# Altium PCB pcb.PcbDoc
Units mm, origin at the board's own origin, x right, y up, seen from the top; angles counter-clockwise.
Board outline 9.5 x 170 mm, 2 copper layers (Top Layer, Bottom Layer), stack 2.101 mm thick; 2 components, 25 nets, 88 pads, 96 vias.
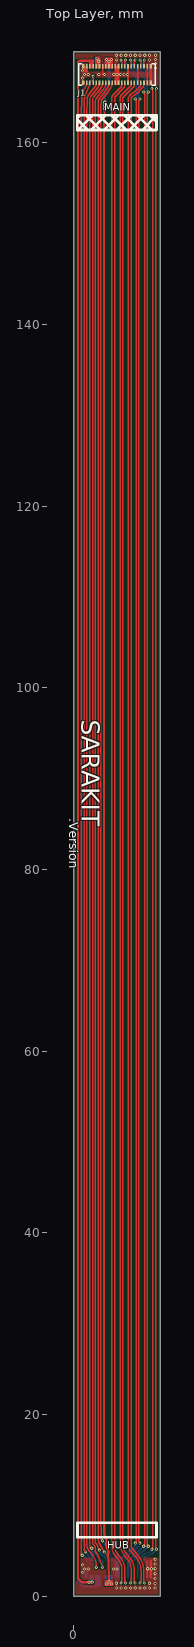
[diagram p0: Top Layer view]
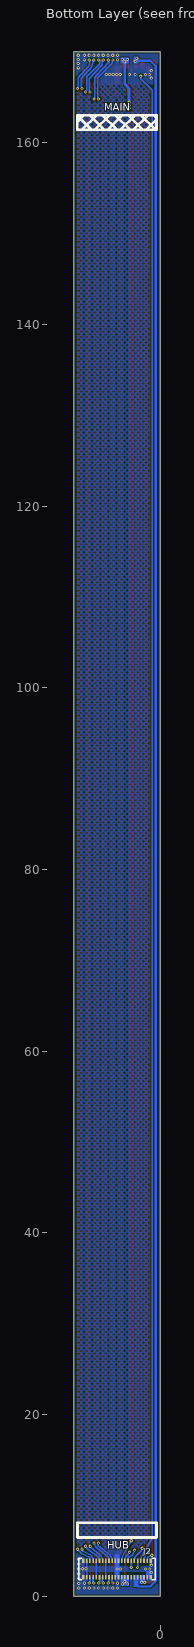
[diagram p1: Bottom Layer view, seen from below]

## Layer stack, top to bottom
Stiffener TOP: core 1, FR4, Dk 4.3
Top Solder: solder mask 0.05, Solder Resist, Dk 3.5
Top Layer: signal copper 0.018
Adhesive 1: prepreg 0.02, Dk 3.4
PI: prepreg 0.025, Polyamid, Dk 3.4
Adhesive 2: prepreg 0.02, Dk 3.4
Bottom Layer: signal copper 0.018
Bottom Solder: solder mask 0.05, Solder Resist, Dk 3.5
Stiffener BOTTOM: core 1, FR4, Dk 4.3

## Board outline
0,0 0,170 9.5,170 9.5,0
board region "STF TOP": 9.5,5 9.5,0 0,0 0,5
board region Flex: 9.5,165 9.5,5 0,5 0,165
board region "STF BOT": 0,165 0,170 9.5,170 9.5,165

## Design rules (kind name [scope] priority, off if disabled: settings)
BoardOutlineClearance [All] p1: gap=0.2 ignorepadtopadclearanceinfootprint=FALSE except(0: Arc-SplitBarrior Arc-SplitContinuation Track-SplitBarrior Track-SplitContinuation SMDPad-SplitBarrior SMDPad-SplitContinuation THPad-SplitBarrior THPad-SplitContinuation Via-SplitBarrior Via-SplitContinuation Fill-SplitBarrior Fill-SplitContinuation Poly-SplitBarrior Poly-SplitContinuation Region-SplitBarrior Region-SplitContinuation Text-SplitBarrior Text-SplitContinuation)
Clearance [All] p1: gap=0.15 ignorepadtopadclearanceinfootprint=FALSE
DiffPairsRouting [All] p1: maxlimit=0.15 minlimit=0.15 mostfreqgap=0.15 toplayer_minwidth=0.15 toplayer_maxwidth=0.15 toplayer_prefwidth=0.15 bottomlayer_minwidth=0.15 bottomlayer_maxwidth=0.15 bottomlayer_prefwidth=0.15 substack1={D1923DC9-8E3A-48FE-8771-0B67DC6D707B} toplayer_{d1923dc9-8e3a-48fe-8771-0b67dc6d707b}_mingap=0.254 toplayer_{d1923dc9-8e3a-48fe-8771-0b67dc6d707b}_maxgap=0.254 toplayer_{d1923dc9-8e3a-48fe-8771-0b67dc6d707b}_prefgap=0.254 toplayer_{d1923dc9-8e3a-48fe-8771-0b67dc6d707b}_minwidth=0.381 toplayer_{d1923dc9-8e3a-48fe-8771-0b67dc6d707b}_maxwidth=0.381 toplayer_{d1923dc9-8e3a-48fe-8771-0b67dc6d707b}_prefwidth=0.381 bottomlayer_{d1923dc9-8e3a-48fe-8771-0b67dc6d707b}_mingap=0.254 bottomlayer_{d1923dc9-8e3a-48fe-8771-0b67dc6d707b}_maxgap=0.254 bottomlayer_{d1923dc9-8e3a-48fe-8771-0b67dc6d707b}_prefgap=0.254 bottomlayer_{d1923dc9-8e3a-48fe-8771-0b67dc6d707b}_minwidth=0.381 bottomlayer_{d1923dc9-8e3a-48fe-8771-0b67dc6d707b}_maxwidth=0.381 bottomlayer_{d1923dc9-8e3a-48fe-8771-0b67dc6d707b}_prefwidth=0.381 substack2={E3085CE0-B6E7-47D6-8C69-CD32297CBFBA} toplayer_{e3085ce0-b6e7-47d6-8c69-cd32297cbfba}_mingap=0.254 toplayer_{e3085ce0-b6e7-47d6-8c69-cd32297cbfba}_maxgap=0.254 toplayer_{e3085ce0-b6e7-47d6-8c69-cd32297cbfba}_prefgap=0.254 toplayer_{e3085ce0-b6e7-47d6-8c69-cd32297cbfba}_minwidth=0.381 toplayer_{e3085ce0-b6e7-47d6-8c69-cd32297cbfba}_maxwidth=0.381 toplayer_{e3085ce0-b6e7-47d6-8c69-cd32297cbfba}_prefwidth=0.381 bottomlayer_{e3085ce0-b6e7-47d6-8c69-cd32297cbfba}_mingap=0.254 bottomlayer_{e3085ce0-b6e7-47d6-8c69-cd32297cbfba}_maxgap=0.254 bottomlayer_{e3085ce0-b6e7-47d6-8c69-cd32297cbfba}_prefgap=0.254 bottomlayer_{e3085ce0-b6e7-47d6-8c69-cd32297cbfba}_minwidth=0.381 bottomlayer_{e3085ce0-b6e7-47d6-8c69-cd32297cbfba}_maxwidth=0.381 bottomlayer_{e3085ce0-b6e7-47d6-8c69-cd32297cbfba}_prefwidth=0.381 maxuncoupledlength=12.7
HoleSize [All] p1: absolutevalues=TRUE maxlimit=10 minlimit=0.15 maxpercent=80.000 minpercent=20.000
HoleToHoleClearance [All] p1: gap=0.2 allowstackedmicrovias=TRUE
MinimumSolderMaskSliver [All] p1: minsoldermaskwidth=0.15
PolygonConnect [All] p1: connectstyle=Direct reliefconductorwidth=0.254 reliefentries=4 polygonreliefangle="90 Angle" airgapwidth=0.254
RoutingCorners [All] p1 off: cornerstyle=45-Degree minsetback=2.54 maxsetback=2.54
RoutingVias [All] p1: holewidth=0.15 width=0.35 viastyle="Through Hole" minholewidth=0.15 minwidth=0.35 maxholewidth=0.15 maxwidth=0.35
SilkToSilkClearance [All] p1: silktosilkclearance=0.1
SilkToSolderMaskClearance [IsPad] p1: minsilkscreentomaskgap=0.1 clearancetoexposedcopper=TRUE
SolderMaskExpansion SolderMaskExpansion_Vias [IsVia] p1: expansion=0.102 istentingtop=TRUE
SolderMaskExpansion [All] p2: expansion=0 istentingtop=FALSE
Width [All] p1: maxlimit=1 minlimit=0.15 preferedwidth=0.2 substack1={D1923DC9-8E3A-48FE-8771-0B67DC6D707B} substack2={E3085CE0-B6E7-47D6-8C69-CD32297CBFBA}
23 further rules are at their usual default settings.

## Classes and differential pairs
differential pair class 100OHM_DIFF: CAM0_CLK CAM0_D0 CAM0_D1 CAM1_CLK CAM1_D0 CAM1_D1
differential pair CAM1_D1: +CAM1_D1_P -CAM1_D1_N
differential pair CAM1_D0: +CAM1_D0_P -CAM1_D0_N
differential pair CAM1_CLK: +CAM1_CLK_P -CAM1_CLK_N
differential pair CAM0_D1: +CAM0_D1_P -CAM0_D1_N
differential pair CAM0_D0: +CAM0_D0_P -CAM0_D0_N
differential pair CAM0_CLK: +CAM0_CLK_P -CAM0_CLK_N

## Components (designator, comment, footprint, x,y, rotation, side; value= is the part's Value field where it differs from the comment)
J1 "5046224012" "MOLEX 5046224012" 4.75,167.5 r0 top
J2 "5046224012" "MOLEX 5046224012" 4.75,3 r0 bottom

## Footprints (in the part's own frame and the unit in brackets; to place one, negate y for a bottom-side part, rotate by r counter-clockwise, add the part's x,y. Pads: shape width x height; smd on the part's side, far side on the other; paste and mask are expansions set on the pad)
"MOLEX 5046224012" [mm]
  rrect20% 0.18x0.485 smd paste-0.01: 1(-3.325,-0.907) 2(-3.325,0.907) 3(-2.975,-0.907) 4(-2.975,0.907) 5(-2.625,-0.907) 6(-2.625,0.907) 7(-2.275,-0.907) 8(-2.275,0.907) 9(-1.925,-0.907) 10(-1.925,0.907) 11(-1.575,-0.907) 12(-1.575,0.907) 13(-1.225,-0.907) 14(-1.225,0.907) 15(-0.875,-0.907) 16(-0.875,0.907) 17(-0.525,-0.907) 18(-0.525,0.907) 19(-0.175,-0.907) 20(-0.175,0.907) 21(0.175,-0.907) 22(0.175,0.907) 23(0.525,-0.907) 24(0.525,0.907) 25(0.875,-0.907) 26(0.875,0.907) 27(1.225,-0.907) 28(1.225,0.907) 29(1.575,-0.907) 30(1.575,0.907) 31(1.925,-0.907) 32(1.925,0.907) 33(2.275,-0.907) 34(2.275,0.907) 35(2.625,-0.907) 36(2.625,0.907) 37(2.975,-0.907) 38(2.975,0.907) 39(3.325,-0.907) 40(3.325,0.907)
  rrect20% 0.28x0.485 smd paste-0.025: MNT1(-3.725,-0.907) MNT2(-3.725,0.907) MNT3(3.725,-0.907) MNT4(3.725,0.907)
  silkscreen extent -4.2,-1.2 4.2,1.2, body extent -4.14,-1 4.15,1, height 0.46

## Part data
J1 J2: library part 511, "SMT 2x20 0.35mm Straight 50V 0.3A", 03 Manufacturer=Molex, 00 Index=511, 01 Name="CONNECTOR PCB 5046224012 Molex", 02 MPN=5046224012, 04 Main Group=CONNECTOR, 05 Sub Group=PCB, 06 Assembly=SMT, 08 Parameter 1=2x20, 09 Parameter 2=0.35mm, 11 Parameter 4=Straight, 12 Parameter 5=50V, 13 Parameter 6=0.3A, 14 Modification Date=09.03.2021, ComponentLink1Description=DATASHEET, ComponentLink1URL=https://www.molex.com/molex/products/part-detail/pcb_headers/5046224012

## Via types
v1: diameter 0.35, hole 0.15, Top Layer to Bottom Layer, tented both sides, 96 vias

## Nets (pads, with @x,y where several pads share a name; then routed paths per layer and width w, separated by ;. In a path a pad name is that pad's centre, name@x,y a point inside that pad or via, vN(x,y) a via of type N, cw(c..) or ccw(c..) an arc to the next point about the centre after c; other vN are vias at no path point)
3.3V: J1.14 J1.16 J1.18 J2.14 J2.16 J2.18 | length 168.3
  Top Layer w0.25: v1(3.414,164.453) v1(3.414,164.103) v1(3.414,163.753) 3.338,162.525 3.338,9.146 3.367,6.81 3.473,6.473 ccw(c3.711,6.55) 3.519,6.39 cw(c3.175,6.1) 3.587,5.918 ccw(c3.816,5.819) 3.568,5.786 3.64,5.263 ccw(c3.888,5.298) 3.695,5.139 cw(c3.35,4.85) 3.76,4.665 ccw(c3.989,4.564) 3.741,4.531 3.813,4.011 cw(c3.565,3.977) 3.815,3.983 3.867,1.662 ccw(c4.117,1.669) v1(3.877,1.598)
  Bottom Layer w0.3: v1(3.414,163.753) v1(3.414,164.103) v1(3.414,164.453) 3.414,165.964 3.877,166.427 v1(3.877,168.902)
  other v1: 3.6,1.35 4.15,1.35 3.6,169.15 4.15,169.15
CAM0_CLK_N: J1.25 J2.26 | length 166.6
  Top Layer w0.15: J1.25 5.61,166.578 5.61,166.322 cw(c5.46,166.322) 5.599,166.265 5.535,166.11 cw(c5.119,166.281) 5.438,165.964 4.544,165.069 ccw(c4.65,164.964) 4.5,164.964 4.5,163.1 4.5,9 4.5,6.037 4.5,5.578 ccw(c6.078,5.578) 4.962,4.462 4.966,4.459 cw(c3.434,2.927) 5.6,2.927 5.6,1.691 ccw(c5.811,1.691) 5.662,1.542 cw(c5.569,1.45) v1(5.7,1.45)
  Bottom Layer w0.15: J2.26 ccw(c5.661,2.056) 5.61,2.056 5.61,1.895 ccw(c5.634,1.871) 5.6,1.871 5.6,1.675 ccw(c5.771,1.675) 5.65,1.554 5.662,1.542 cw(c5.569,1.45) v1(5.7,1.45)
CAM0_CLK_P: J1.23 J2.24 | length 166.6
  Top Layer w0.15: 4.2,164.964 cw(c4.35,164.964) 4.2,164.965 ; v1(5.2,1.45) cw(c5.331,1.45) 5.238,1.542 ccw(c5.089,1.691) 5.3,1.691 5.3,2.922 ccw(c3.422,2.922) 4.75,4.25 4.687,4.313 cw(c5.862,5.488) 4.2,5.488 4.2,6.037 4.2,9 4.2,163.1 4.2,164.965 ; J1.23 5.269,166.586 5.269,166.281 cw(c5.119,166.281) 5.225,166.175 4.331,165.281 ccw(c4.65,164.964) 4.2,164.965
  Bottom Layer w0.15: v1(5.2,1.45) cw(c5.331,1.45) 5.238,1.542 5.25,1.554 ccw(c5.129,1.675) 5.3,1.675 5.3,1.871 ccw(c5.266,1.871) 5.29,1.895 5.29,2.056 ccw(c5.239,2.056) J2.24
CAM0_D0_N: J1.37 J2.38 | length 166.9
  Top Layer w0.15: J1.37 7.71,166.578 7.71,166.371 cw(c7.56,166.371) 7.698,166.314 7.639,166.172 cw(c7.501,166.23) 7.63,166.154 7.605,166.111 cw(c7.217,166.338) 7.534,166.019 6.904,165.389 cw(c6.586,165.708) 6.782,165.303 ccw(c7.329,164.171) 6.369,164.982 ccw(c6.81,164.668) 6.311,164.879 ccw(c6.45,164.822) 6.3,164.823 6.3,164.738 6.3,164.63 6.3,163.1 6.3,60.483 6.3,9 6.3,5.71 ccw(c7.255,5.71) 6.58,5.035 6.872,4.743 cw(c4.872,2.743) 7.7,2.743 7.7,1.691 ccw(c7.911,1.691) 7.762,1.542 cw(c7.669,1.45) v1(7.8,1.45)
  Bottom Layer w0.15: J2.38 ccw(c7.761,2.056) 7.71,2.056 7.71,1.909 cw(c7.676,1.909) 7.7,1.885 7.7,1.691 ccw(c7.911,1.691) 7.762,1.542 cw(c7.669,1.45) v1(7.8,1.45)
CAM0_D0_P: J1.35 J2.36 | length 166.9
  Top Layer w0.15: v1(7.3,1.45) cw(c7.431,1.45) 7.338,1.542 ccw(c7.189,1.691) 7.4,1.691 7.4,2.738 ccw(c4.86,2.738) 6.656,4.534 6.367,4.823 cw(c7.253,5.709) 6,5.709 6,9 6,60.359 6,163.1 6,163.224 6,164.825 cw(c6.774,164.819) 6.021,164.997 cw(c6.167,164.963) 6.047,165.054 6.129,165.163 cw(c6.369,164.982) 6.141,165.178 cw(c7.329,164.171) 6.652,165.573 ccw(c6.586,165.708) 6.692,165.601 7.323,166.232 ccw(c7.217,166.338) 7.367,166.338 7.367,166.584 J1.35
  Bottom Layer w0.15: v1(7.3,1.45) cw(c7.431,1.45) 7.338,1.542 ccw(c7.189,1.691) 7.4,1.691 7.4,1.885 cw(c7.424,1.909) 7.39,1.909 7.39,2.056 ccw(c7.339,2.056) J2.36
CAM0_D1_N: J1.31 J2.32 | length 166.7
  Top Layer w0.15: J1.31 6.66,166.578 6.66,166.395 6.64,166.375 6.64,166.193 6.273,165.826 5.444,164.997 ccw(c5.55,164.891) 5.4,164.891 5.4,163.1 5.4,60.124 5.4,9 5.4,5.815 ccw(c7.242,5.815) 5.94,4.512 5.943,4.509 cw(c4.237,2.802) 6.65,2.802 6.65,1.691 ccw(c6.861,1.691) 6.712,1.542 cw(c6.619,1.45) v1(6.75,1.45)
  Bottom Layer w0.15: J2.32 ccw(c6.711,2.056) 6.66,2.056 6.66,1.895 ccw(c6.684,1.871) 6.65,1.871 6.65,1.675 ccw(c6.821,1.675) 6.7,1.554 6.712,1.542 cw(c6.619,1.45) v1(6.75,1.45)
CAM0_D1_P: J1.29 J2.30 | length 166.7
  Top Layer w0.15: v1(6.25,1.45) cw(c6.381,1.45) 6.288,1.542 ccw(c6.139,1.691) 6.35,1.691 6.35,2.797 ccw(c4.224,2.797) 5.727,4.3 5.726,4.302 cw(c7.236,5.812) 5.1,5.812 5.1,9 5.1,60 5.1,163.1 5.1,163.224 5.1,164.891 cw(c5.55,164.891) 5.231,165.208 6.149,166.126 6.317,166.294 6.317,166.584 J1.29
  Bottom Layer w0.15: v1(6.25,1.45) cw(c6.381,1.45) 6.288,1.542 6.3,1.554 ccw(c6.179,1.675) 6.35,1.675 6.35,1.871 ccw(c6.316,1.871) 6.34,1.895 6.34,2.056 ccw(c6.289,2.056) J2.30
CAM1_CLK_N: J1.26 J2.25 | length 167.3
  Top Layer w0.15: v1@5.6,168.996 5.6,168.615 5.61,168.605 5.61,168.422 J1.26 ; v1(7.275,5.85) ccw(c7.144,5.85) 7.237,5.942 7.202,5.977 cw(c7.267,6.042) 7.175,6.042 7.175,9 7.175,163.1 7.175,164.646 7.275,164.746 v1(7.275,164.8)
  Bottom Layer w0.15: J2.25 5.64,4.075 5.667,4.188 cw(c5.903,4.132) 5.75,4.321 6.985,5.324 ccw(c6.701,5.673) 7.118,5.503 7.21,5.73 cw(c7.349,5.673) 7.218,5.746 v1(7.275,5.85) ; v1(5.7,169.1) 5.679,169.1 5.6,169.021 5.6,168.896 7.045,167.38 cw(c6.725,167.064) 7.175,167.064 7.175,164.954 7.275,164.854 v1(7.275,164.8)
CAM1_CLK_P: J1.24 J2.23 | length 167.3
  Top Layer w0.15: J1.24 5.29,168.422 5.29,168.605 5.3,168.615 v1@5.3,168.996 ; v1(6.775,5.85) cw(c6.906,5.85) 6.813,5.942 6.848,5.977 ccw(c6.783,6.042) 6.875,6.042 6.875,9 6.875,163.1 6.875,164.646 6.775,164.746 v1(6.775,164.8)
  Bottom Layer w0.15: v1(5.2,169.1) 5.234,169.007 5.292,168.793 ccw(c5.727,168.91) 5.406,168.595 6.831,167.17 cw(c6.725,167.064) 6.875,167.064 6.875,164.954 6.775,164.854 v1(6.775,164.8) ; J2.23 5.29,4.075 5.316,4.188 cw(c5.553,4.132) 5.344,4.257 5.438,4.412 cw(c5.903,4.132) 5.561,4.553 6.796,5.557 ccw(c6.701,5.673) 6.833,5.745 v1(6.775,5.85)
CAM1_D0_N: J1.38 J2.37 | length 167.1
  Top Layer w0.15: v1@7.7,168.996 7.7,168.615 7.71,168.605 7.71,168.422 J1.38 ; v1(9.1,5.175) cw(c9.153,5.315) 9.003,5.314 9,5.647 cw(c9.15,5.649) 9,5.649 9,9 9,163.1 9,165.734 cw(c9.15,165.734) 9.044,165.839 9.1,165.896 v1(9.1,165.95)
  Bottom Layer w0.15: J2.37 7.74,4.075 7.767,4.188 cw(c8.003,4.132) 7.912,4.357 8.576,4.651 ccw(c8.395,5.062) 8.69,4.723 8.863,4.873 ccw(c8.6,5.175) 8.92,4.935 v1(9.1,5.175) ; v1(7.8,169.1) 7.737,168.962 7.737,168.838 7.869,168.381 8.87,167.38 cw(c8.55,167.064) 9,167.064 9,166.104 9.1,166.004 v1(9.1,165.95)
CAM1_D0_P: J1.36 J2.35 | length 167
  Top Layer w0.15: J1.36 7.39,168.422 7.39,168.605 7.4,168.615 v1@7.4,168.996 ; v1(8.6,5.175) 8.662,5.271 ccw(c8.536,5.352) 8.686,5.345 8.7,5.642 ccw(c8.55,5.649) 8.7,5.649 8.7,9 8.7,163.1 8.7,163.224 8.7,165.734 ccw(c8.55,165.734) 8.663,165.833 8.637,165.862 cw(c8.75,165.961) v1(8.6,165.95)
  Bottom Layer w0.15: v1(7.3,169.1) 7.321,169.1 7.4,169.021 7.4,168.934 7.437,168.714 7.569,168.257 8.7,167.064 8.7,166.104 8.6,166.004 v1(8.6,165.95) ; J2.35 7.39,4.075 7.417,4.188 cw(c7.653,4.132) 7.445,4.257 7.538,4.412 cw(c8.003,4.132) 7.784,4.629 8.455,4.925 ccw(c8.395,5.062) 8.534,5.007 v1(8.6,5.175)
CAM1_D1_N: J1.32 J2.31 | length 167.3
  Top Layer w0.15: J1.32 6.66,168.422 6.66,168.605 6.65,168.615 6.65,168.996 6.75,169.096 v1(6.75,169.1) ; v1(8.2,5.5) 8.2,5.554 8.1,5.654 8.1,9 8.1,163.1 8.1,165.359 cw(c8.25,165.359) 8.144,165.464 8.2,165.521 v1(8.2,165.575)
  Bottom Layer w0.15: J2.31 6.69,4.075 6.717,4.188 cw(c6.953,4.132) 6.807,4.326 7.941,5.181 ccw(c7.7,5.5) 8.02,5.26 v1(8.2,5.5) ; v1(6.75,169.1) 6.65,168.934 6.65,168.757 ccw(c6.8,168.757) 6.694,168.651 7.97,167.375 cw(c7.65,167.058) 8.1,167.058 8.1,165.729 8.2,165.629 v1(8.2,165.575)
CAM1_D1_P: J1.30 J2.29 | length 167.1
  Top Layer w0.15: J1.30 6.34,168.422 6.34,168.605 6.35,168.615 v1@6.35,168.996 ; v1(7.7,5.5) 7.7,5.554 7.8,5.654 7.8,9 7.8,163.1 7.8,163.224 7.8,165.359 ccw(c7.65,165.359) 7.763,165.458 7.737,165.487 cw(c7.85,165.586) v1(7.7,165.575)
  Bottom Layer w0.15: v1(6.25,169.1) 6.271,169.1 6.35,169.021 6.35,168.757 ccw(c6.8,168.757) 6.475,168.446 7.8,167.058 7.8,165.729 7.7,165.629 v1(7.7,165.575) ; J2.29 6.34,4.075 6.366,4.188 cw(c6.603,4.132) 6.395,4.257 6.488,4.412 cw(c6.953,4.132) 6.616,4.557 7.643,5.372 ccw(c7.55,5.49) 7.7,5.493 v1(7.7,5.5)
CAMERA_GPIO: J1.3 J2.3 | length 163
  Top Layer w0.15: 1.25,165.163 1.231,165.13 ccw(c1.488,164.976) 1.188,164.985 cw(c1.039,164.991) 1.186,164.964 1.173,164.892 ccw(c1.911,164.757) 1.161,164.759 1.149,163.1 1.149,9 1.149,5.595 1.149,5.179 ccw(c1.579,5.179) v1(1.275,4.875) ; 1.25,165.163 cw(c1.38,165.087) 1.251,165.164 1.278,165.21 ccw(c1.149,165.287) 1.288,165.23 1.721,166.275 ccw(c1.497,166.368) 1.724,166.282 ccw(c1.497,166.368) 1.734,166.312 1.76,166.425 J1.3
  Bottom Layer w0.15: v1(1.275,4.875) 1.444,4.706 cw(c0.646,3.907) J2.3
FILTER_CTRL: J1.5 J2.5 | length 165
  Top Layer w0.15: J1.5 v1(2.125,167.325)
  Bottom Layer w0.15: J2.5 2.11,4.075 2.084,4.188 ccw(c1.847,4.132) 2.068,4.234 1.947,4.498 ccw(c0.646,3.907) 1.883,4.622 ccw(c0.646,3.907) 1.882,4.625 0.875,6.365 0.875,8.878 0.875,165.775 2.125,167.025 v1(2.125,167.325)
GND: J1.2 J1.12 J1.19 J1.20 J1.21 J1.22 J1.27 J1.28 J1.33 J1.34 J1.39 J1.40 J1.MNT1 J1.MNT2 J1.MNT3 J1.MNT4 J2.2 J2.12 J2.19 J2.20 J2.21 J2.22 J2.27 J2.28 J2.33 J2.34 J2.39 J2.40 J2.MNT1 J2.MNT2 J2.MNT3 J2.MNT4 | length 17.2
  Top Layer w0.18: 3.175,167.5 J1.12 ; J1.27 J1.28 ; J1.33 J1.34 ; 8.075,2.092 8.075,3.907 ; J1.39 J1.40
  Top Layer w0.28: 8.475,2.092 8.475,3.907 ; J1.MNT3 J1.MNT4
  Bottom Layer w0.18: J2.28 J2.27 ; J2.34 J2.33 ; J2.40 J2.39
  other v1: 4.685,0.9 5.205,0.9 5.725,0.9 6.245,0.9 6.765,0.9 7.285,0.9 7.805,0.9 8.325,0.9 8.955,0.9 8.95,1.397 4.685,1.42 8.325,1.42 8.95,1.94 8.95,2.482 0.975,2.6 1.175,3 1.6,3 4.377,3.001 4.75,3 8.15,3.025 8.55,3.025 8.95,3.025 0.973,3.422 8.95,3.545 8.95,4.065 0.975,167.1 1.175,167.5 1.6,167.5 2.75,167.5 3.375,167.5 4.395,167.5 4.777,167.5 5.159,167.5 5.542,167.5 5.924,167.5 0.973,167.922 9,168.23 9,168.712 4.69,169.105 8.33,169.105 9,169.143 4.69,169.625 5.21,169.625 5.73,169.625 6.25,169.625 6.77,169.625 7.29,169.625 7.81,169.625 8.33,169.625 9,169.625
ID_SC: J1.17 J2.17 | length 163.4
  Top Layer w0.15: 2.988,9 2.988,18.905 2.988,163.1 2.988,163.796 3.014,164.592 3.023,164.617 ; 2.99,9 3,6.35 v1(3.175,6.1) ; 3.024,164.618 3.047,164.646 3.596,165.311 ccw(c2.44,166.267) 3.738,165.516 cw(c3.868,165.44) 3.742,165.521 4.041,165.978 ccw(c3.79,166.143) 4.068,166.031 4.118,166.155 ccw(c3.84,166.267) 4.13,166.191 cw(c4.275,166.151) 4.149,166.233 ccw(c3.947,166.368) 4.19,166.368 4.19,166.492 cw(c4.34,166.492) 4.195,166.532 4.21,166.532 J1.17
  Bottom Layer w0.15: v1(3.175,6.1) 4.09,4.471 4.19,4.233 4.21,4.075 J2.17
ID_SD: J1.15 J2.15 | length 163.4
  Top Layer w0.15: v1(3.35,4.85) 3.189,5.175 cw(c3.324,5.241) 3.182,5.195 ccw(c2.8,5.075) 3.128,5.305 2.775,5.934 2.688,6.225 2.688,9 2.688,163.1 2.688,164.525 cw(c3.138,164.521) 2.792,164.809 3.365,165.503 ccw(c2.44,166.267) 3.484,165.676 3.79,166.143 3.84,166.267 3.861,166.436 J1.15
  Bottom Layer w0.15: v1(3.35,4.85) 3.79,4.357 3.84,4.233 3.86,4.075 J2.15
LED_N: J1.4 J1.6 J2.4 J2.6 | length 170.3
  Top Layer w0.25: v1(2.025,1.55) 0.875,1.55 0.848,1.577 0.475,1.95 0.475,9 0.475,163.1 0.475,168.879 0.621,169.025 2.075,169.025
  other v1: 1.669,1.544
LED_P: J1.8 J1.10 J2.8 J2.10 | length 172
  Bottom Layer w0.25: 2.55,1.5 2.55,1.222 2.404,1.075 1.075,1.075 0.475,1.675 0.475,4.883 0.475,8.878 0.475,166.104 0.475,168.404 1.096,169.025 2.675,169.025 v1(2.75,168.95)
  other v1: 2.55,169.275
MOT_ACC_SCL: J1.9 J2.9 | length 163.5
  Top Layer w0.15: v1@2,5.25 1.992,5.25 v1(1.968,5.274) 1.933,5.274 cw(c1.933,5.424) 1.795,5.365 cw(c2.337,5.594) 1.765,5.46 cw(c1.911,5.492) 1.761,5.491 1.761,5.566 ccw(c1.72,5.566) 1.749,5.595 1.749,9 1.749,163.1 1.773,164.816 1.91,165.136 cw(c2.048,165.077) 1.921,165.157 cw(c2.633,164.703) 1.982,165.241 2.644,166.043 ccw(c2.297,166.329) 2.658,166.062 ; 2.659,166.063 ccw(c2.539,166.152) 2.662,166.066 2.701,166.123 ccw(c2.578,166.209) 2.715,166.148 2.769,166.27 ccw(c2.547,166.368) 2.784,166.312 2.81,166.425 J1.9
  Bottom Layer w0.15: v1(1.968,5.274) ccw(c2.433,5.274) 2.104,4.946 2.725,4.325 ; 2.725,4.325 cw(c2.484,4.084) 2.825,4.084 J2.9
MOT_ACC_SDA: J1.7 J2.7 | length 164.8
  Top Layer w0.15: 1.482,164.911 1.481,164.908 1.468,164.838 ccw(c1.911,164.757) 1.461,164.759 1.449,163.1 1.449,9 1.449,5.594 ccw(c2.337,5.594) 1.565,5.155 ccw(c1.695,5.231) 1.58,5.134 cw(c1.275,4.875) 1.629,5.061 ccw(c1.761,5.132) 1.643,5.04 ccw(c2.337,5.594) 1.711,4.964 1.85,4.825 cw(c0.341,3.316) 2.475,3.316 v1(2.475,3.175) v1@2.475,3.15 ; 1.482,164.912 1.491,164.962 cw(c1.638,164.935) 1.509,165.012 1.553,165.086 1.645,165.28 cw(c2.633,164.703) 1.75,165.432 2.412,166.234 ccw(c2.297,166.33) 2.445,166.31 2.446,166.315 2.46,166.425 J1.7
  Bottom Layer w0.15: v1@2.475,3.15 v1(2.475,3.175) J2.7
PIR_INT: J1.1 J2.1 | length 163.2
  Top Layer w0.15: 0.861,164.759 cw(c1.911,164.757) 0.863,164.83 0.888,165.186 ccw(c0.738,165.196) 0.888,165.193 cw(c1.038,165.192) 0.902,165.254 ; 0.861,164.83 0.849,163.224 0.849,163.1 0.849,9 0.849,5.594 0.849,4.683 ccw(c1.108,4.683) v1(0.925,4.5) ; 0.902,165.255 1.354,166.237 1.373,166.288 ccw(c1.137,166.378) 1.376,166.295 ccw(c1.137,166.378) 1.382,166.316 1.41,166.425 J1.1
  Bottom Layer w0.15: v1(0.925,4.5) 1.244,4.351 cw(c1.137,4.122) 1.382,4.184 1.41,4.075 J2.1
SCL0: J1.13 J2.13 | length 163.4
  Top Layer w0.15: 2.509,164.937 ccw(c2.912,164.602) 2.388,164.605 2.388,163.1 2.388,9 2.388,5.895 2.527,5.731 2.595,5.593 cw(c1.828,5.207) 2.629,5.517 v1(2.8,5.075) ; 2.509,164.937 3.134,165.694 ccw(c2.44,166.267) 3.227,165.831 ; 3.227,165.831 3.49,166.267 3.511,166.436 J1.13
  Bottom Layer w0.15: v1(2.8,5.075) 2.95,4.684 3.129,4.48 3.158,4.454 3.348,4.375 3.49,4.233 3.516,4.003 J2.13
SDA0: J1.11 J2.11 | length 164.8
  Top Layer w0.15: 2.387,4.946 cw(c2.513,5.026) 2.368,5.063 ccw(c1.828,5.207) 2.242,5.583 cw(c2.354,5.683) 2.223,5.611 ccw(c2.096,5.53) 2.211,5.627 2.124,5.73 cw(c2.239,5.827) 2.088,5.828 2.088,9 2.088,163.1 2.088,164.729 2.104,164.824 2.214,165.051 2.903,165.886 ccw(c2.44,166.267) 2.97,165.987 3.112,166.254 ccw(c2.897,166.368) 3.134,166.312 3.16,166.425 J1.11 ; 2.387,4.945 2.639,4.551 cw(c2.513,4.47) 2.66,4.5 ccw(c2.807,4.53) 2.662,4.491 v1(3.175,3.175)
  Bottom Layer w0.15: v1(3.175,3.175) J2.11

## Polygon pours and split planes (outlines as drawn)
GND on Bottom Layer "GND_L02_P001" (solid, remove dead copper, pour order 1): 0,5.5 9.5,5.5 9.5,0 0,0
GND on Bottom Layer "GND_L02_P000" (solid, remove dead copper, pour order 0): 9.5,166.4 0,166.4 0,170.5 9.5,170.5
GND on Bottom Layer "GND_L02_P003" (hatched 45Degree grid 0.424 track 0.16, remove dead copper, pour order 3): 0,167.925 9.5,167.925 9.5,2.975 0,2.975
GND on Top Layer "GND_L01_P004" (solid, remove dead copper, pour order 4): 0,4.25 9.5,4.25 9.5,0 0,0
GND on Top Layer "GND_L01_P002" (solid, remove dead copper, pour order 2): 9.5,166.25 0,166.25 0,170.5 9.5,170.5
no net on Top Overlay "MAIN HATCH TOP" (hatched 45Degree grid 1 track 0.3): 0,163 9.5,163 9.5,161.4 0,161.4
no net on Bottom Overlay "MAIN HATCH BOT" (hatched 45Degree grid 1 track 0.3): 0,163 9.5,163 9.5,161.425 0,161.425

## Other copper
Top Layer:
  region net 3.3V: 3.425,1.175 4.325,1.175 4.325,1.775 3.425,1.775
  region net 3.3V: 4.315,168.193 3.425,168.193 3.425,169.325 4.315,169.325
  region net LED_P: 2.915,168.183 2.385,168.183 2.385,169.45 2.915,169.45
  region net LED_N: 2.215,168.183 1.685,168.183 1.685,169.15 2.215,169.15
  region net GND: 1.522,168.398 1.523,168.398 1.523,167.762 1.149,167.762 1.15,167.763 1.15,168.398
  region net GND: 4.486,168.424 5.015,168.423 5.015,166.368 4.484,166.368
  pour cut-out: 1.175,167.185 1.175,166.835 8.325,166.835 8.325,167.185
  pour cut-out: 1.175,168.165 1.175,167.815 8.325,167.815 8.325,168.165
Bottom Layer:
  region net 3.3V: 4.315,2.317 3.435,2.317 3.425,2.307 3.425,1.175 4.315,1.175
  region net LED_P: 2.915,2.317 2.385,2.317 2.385,1.05 2.915,1.05
  region net LED_N: 2.215,2.317 1.685,2.317 1.685,1.375 2.215,1.375
  region net GND: 4.485,4.575 5.015,4.575 5.015,2.092 4.485,2.092
  pour cut-out: 1.175,2.685 1.175,2.335 8.325,2.335 8.325,2.685
  pour cut-out: 1.175,3.665 1.175,3.315 8.325,3.315 8.325,3.665
  pour cut-out: 0.6,4.1 1.3,4.1 1.3,4.5 0.6,4.5
  region net GND: 1.522,2.102 1.523,2.102 1.523,2.738 1.149,2.738 1.15,2.737 1.15,2.102
  pour cut-out: 0.75,166.4 1.45,166.4 1.45,166 0.75,166
  region net LED_P: 2.915,168.762 2.385,168.762 2.385,169.45 2.915,169.45
  region net 3.3V: 3.425,169.325 4.325,169.325 4.325,168.725 3.425,168.725

## Silkscreen, mask and mechanical layers (free items; w line width, h text height)
Top Overlay:
  lines w0.3: 0.4,6.487 0.4,8.087 9.1,8.087 9.1,6.487 0.4,6.487
  text "MAIN" at 3.35,163.5 h0.8
  text "SARAKIT" at 0.9,96.498 h2 r270
  text ".Version" at -0.486,85.655 h1 r270
  text "HUB" at 3.684,5.25 h0.8
Bottom Overlay:
  lines w0.3: 0.4,6.475 0.4,8.075 9.1,8.075 9.1,6.475 0.4,6.475
  text "MAIN" at 6.15,163.5 h0.8
  text "HUB" at 5.816,5.239 h0.8
Mechanical 1:
  lines w0.15: 0.875,170.525 0.875,180.525 ; 1.175,170.525 1.175,180.525 ; 1.475,170.525 1.475,180.525 ; 1.775,170.525 1.775,180.525 ; 2.075,170.525 2.075,180.525 ; 2.375,170.525 2.375,180.525 ; 2.675,170.525 2.675,180.525 ; 2.975,170.525 2.975,180.525 ; 4.2,170.525 4.2,180.525 ; 4.5,170.525 4.5,180.525 ; 5.1,170.525 5.1,180.525 ; 5.4,170.525 5.4,180.525 ; 6,170.525 6,180.525 ; 6.3,170.525 6.3,180.525 ; 6.875,170.525 6.875,180.525 ; 7.175,170.525 7.175,180.525 ; 7.8,170.525 7.8,180.525 ; 8.1,170.525 8.1,180.525 ; 8.7,170.525 8.7,180.525 ; 9,170.525 9,180.525
  lines w0.25: 0.475,170.575 0.475,180.575 ; 3.325,170.575 3.331,180.575
Fab Notes:
  drawing of 632 lines, arcs and shapes, not listed
  text ".Project_Code" at 26.4,171 h2
  text "SaraAI LLC" at 26.4,167 h2
  text "Layer" at 80.254,166.762 h1.52
  text "Name" at 90.666,166.762 h1.52
  text "Material" at 117.074,166.762 h1.52
  text "Thickness" at 138.912,166.762 h1.52
  text "Constant" at 155.418,166.762 h1.52
  text "Gerber" at 169.893,166.762 h1.52
  text "Stiffener BOTTOM" at 181.828,166.762 h1.52
  text "Flex" at 208.237,166.762 h1.52
  text "Stiffener TOP" at 221.188,166.762 h1.52
  text "FR4 STIFFENER / BOTTOM SIDE" at 9.875,166.243 h0.8
  text "Date:" at 26.125,163.7 h1
  text ".ModifiedDate" at 31.125,163.7 h1
  text "Stiffener TOP" at 90.666,163.714 h1.52
  text "FR4" at 117.074,163.714 h1.52
  text "1,000mm" at 138.912,163.714 h1.52
  text "4.3" at 155.418,163.714 h1.52
  text "Version:" at 26.125,161.7 h1
  text ".Version" at 34.125,161.7 h1
  text "Top Overlay" at 90.666,160.666 h1.52
  text "GTO" at 169.893,160.666 h1.52
  text "Material" at 25.925,158.05 h1.5
  text "Top Solder" at 90.666,157.618 h1.52
  text "Solder Resist" at 117.074,157.618 h1.52
  text "0,050mm" at 138.912,157.618 h1.52
  text "3.5" at 155.418,157.618 h1.52
  text "GTS" at 169.893,157.618 h1.52
  text "Polyamide compilant with RoHs requirements" at 26,155.134 h1
  text "1" at 80.254,154.57 h1.52
  text "Top Layer" at 90.666,154.57 h1.52
  text "0,018mm" at 138.912,154.57 h1.52
  text "GTL" at 169.893,154.57 h1.52
  text "Adhesive 1" at 90.666,151.522 h1.52
  text "0,020mm" at 138.912,151.522 h1.52
  text "3.4" at 155.418,151.522 h1.52
  text "Finish" at 26,149.85 h1.5
  text "PI" at 90.666,148.474 h1.52
  text "Polyamid" at 117.074,148.474 h1.52
  text "0,025mm" at 138.912,148.474 h1.52
  text "3.4" at 155.418,148.474 h1.52
  text "Coverlay" at 26.2,147.667 h1
  text "Yellow" at 37.2,147.5 h1
  text "WHITE" at 37.125,145.7 h1
  text "Silkscreen:" at 26.2,145.5 h1
  text "Adhesive 2" at 90.666,145.426 h1.52
  text "0,020mm" at 138.912,145.426 h1.52
  text "3.4" at 155.418,145.426 h1.52
  text "Cu finish:" at 26.2,143.5 h1
  text "Che Ni/Au selective (ENIG)" at 37.2,143.5 h1
  text "2" at 80.254,142.378 h1.52
  text "Bottom Layer" at 90.666,142.378 h1.52
  text "0,018mm" at 138.912,142.378 h1.52
  text "GBL" at 169.893,142.378 h1.52
  text "Bottom Solder" at 90.666,139.33 h1.52
  text "Solder Resist" at 117.074,139.33 h1.52
  text "0,050mm" at 138.912,139.33 h1.52
  text "3.5" at 155.418,139.33 h1.52
  text "GBS" at 169.893,139.33 h1.52
  text "Bottom Overlay" at 90.666,136.282 h1.52
  text "GBO" at 169.893,136.282 h1.52
  text "The solder mask expansion equals 0mm. The manufacturer is allowed to increase the opening in accordance with production tolerances." at 26,136.121 h1
  text "Stiffener BOTTOM" at 90.666,133.234 h1.52
  text "FR4" at 117.074,133.234 h1.52
  text "1,000mm" at 138.912,133.234 h1.52
  text "4.3" at 155.418,133.234 h1.52
  text "Gerber Files Description" at 26.225,132.7 h1.5
  text "Layers related to the assembly are not included by default in the package generated for the laminate manufacturer." at 25.925,126.321 h1
  text ".GTL - Top Layer (no. 1) (copper)" at 26.075,123.867 h1
  text ".Gn  - Inner Layer (no. n) (copper)" at 26.075,121.867 h1
  text ".GBL - Bottom Layer (copper)" at 26.075,119.867 h1
  text ".GTO - Top Overlay" at 26.075,116.867 h1
  text ".GBO - Bottom Overlay" at 26.075,114.867 h1
  text ".GTS - Top Solder Mask" at 26.075,111.867 h1
  text ".GBS - Bottom Solder Mask" at 26.075,109.7 h1
  text ".GTP - Top Paste" at 26.075,106.867 h1
  text ".GBP - Bottom Paste" at 26.075,104.7 h1
  text ".GM2 - Fab Notes" at 26.075,101.7 h1
  text ".GM3 - Board outline" at 26.075,99.7 h1
  text ".GM7 - Internal Milling Outline" at 26.075,97.867 h1
  text ".GM11 - Top Assembly Information" at 26.075,94.867 h1
  text ".GM12 - Bottom Assembly Information" at 26.075,92.867 h1
  text ".GM15 - Top Courtyard" at 26.075,89.867 h1
  text ".GM16 - Bottom Courtyard" at 26.075,87.867 h1
  text "FR4 STIFFENER / TOP SIDE" at 9.875,1.268 h0.8
Board Shape:
  the board outline again, w0.15
Drill Drawing:
  lines w0.254: 102.181,122.206 103.875,122.206 103.875,123.899 102.181,123.899 102.181,122.206
  lines w0.381: 100.663,121.063 275.926,121.063 ; 100.663,124.873 275.926,124.873 ; 114.655,117.253 114.655,128.683 ; 128.367,117.253 128.367,128.683 ; 154.776,117.253 154.776,128.683 ; 167.625,117.253 167.625,128.683 ; 186.263,117.253 186.263,128.683 ; 224.352,117.253 224.352,128.683 ; 239.334,117.253 239.334,128.683 ; 258.277,117.253 258.277,128.683 ; 100.663,117.253 275.926,117.253 275.926,128.683 100.663,128.683 100.663,117.253
  text "Symbol" at 102.949,126.016 h1.83
  text "Count" at 115.798,126.016 h1.83
  text "Hole Size" at 129.51,126.016 h1.83
  text "Plated" at 155.919,126.016 h1.83
  text "Hole Type" at 168.768,126.016 h1.83
  text "Drill Layer Pair" at 187.406,126.016 h1.83
  text "Via/Pad" at 225.495,126.016 h1.83
  text "Pad Shape" at 240.477,126.016 h1.83
  text "Template" at 259.42,126.016 h1.83
  text "96" at 115.798,122.206 h1.52
  text "0,150mm (5,91mil)" at 129.51,122.206 h1.52
  text "PTH" at 155.919,122.206 h1.52
  text "Round" at 168.768,122.206 h1.52
  text "Top Layer - Bottom Layer" at 187.406,122.206 h1.52
  text "Via" at 225.495,122.206 h1.52
  text "Rounded" at 240.477,122.206 h1.52
  text "v35h15" at 259.42,122.206 h1.52
  text "96 Total" at 115.798,118.396 h1.52

## Text inside footprints (layer, text, board x,y; h text height)
J1: Mechanical 4 "Coper prohibited area" at 2.734,167.433 h0.2
J2: Mechanical 4 "Coper prohibited area" at 2.734,3.067 h0.2 r180